# EAGLE board ciencia prima (EAGLE 5.11)
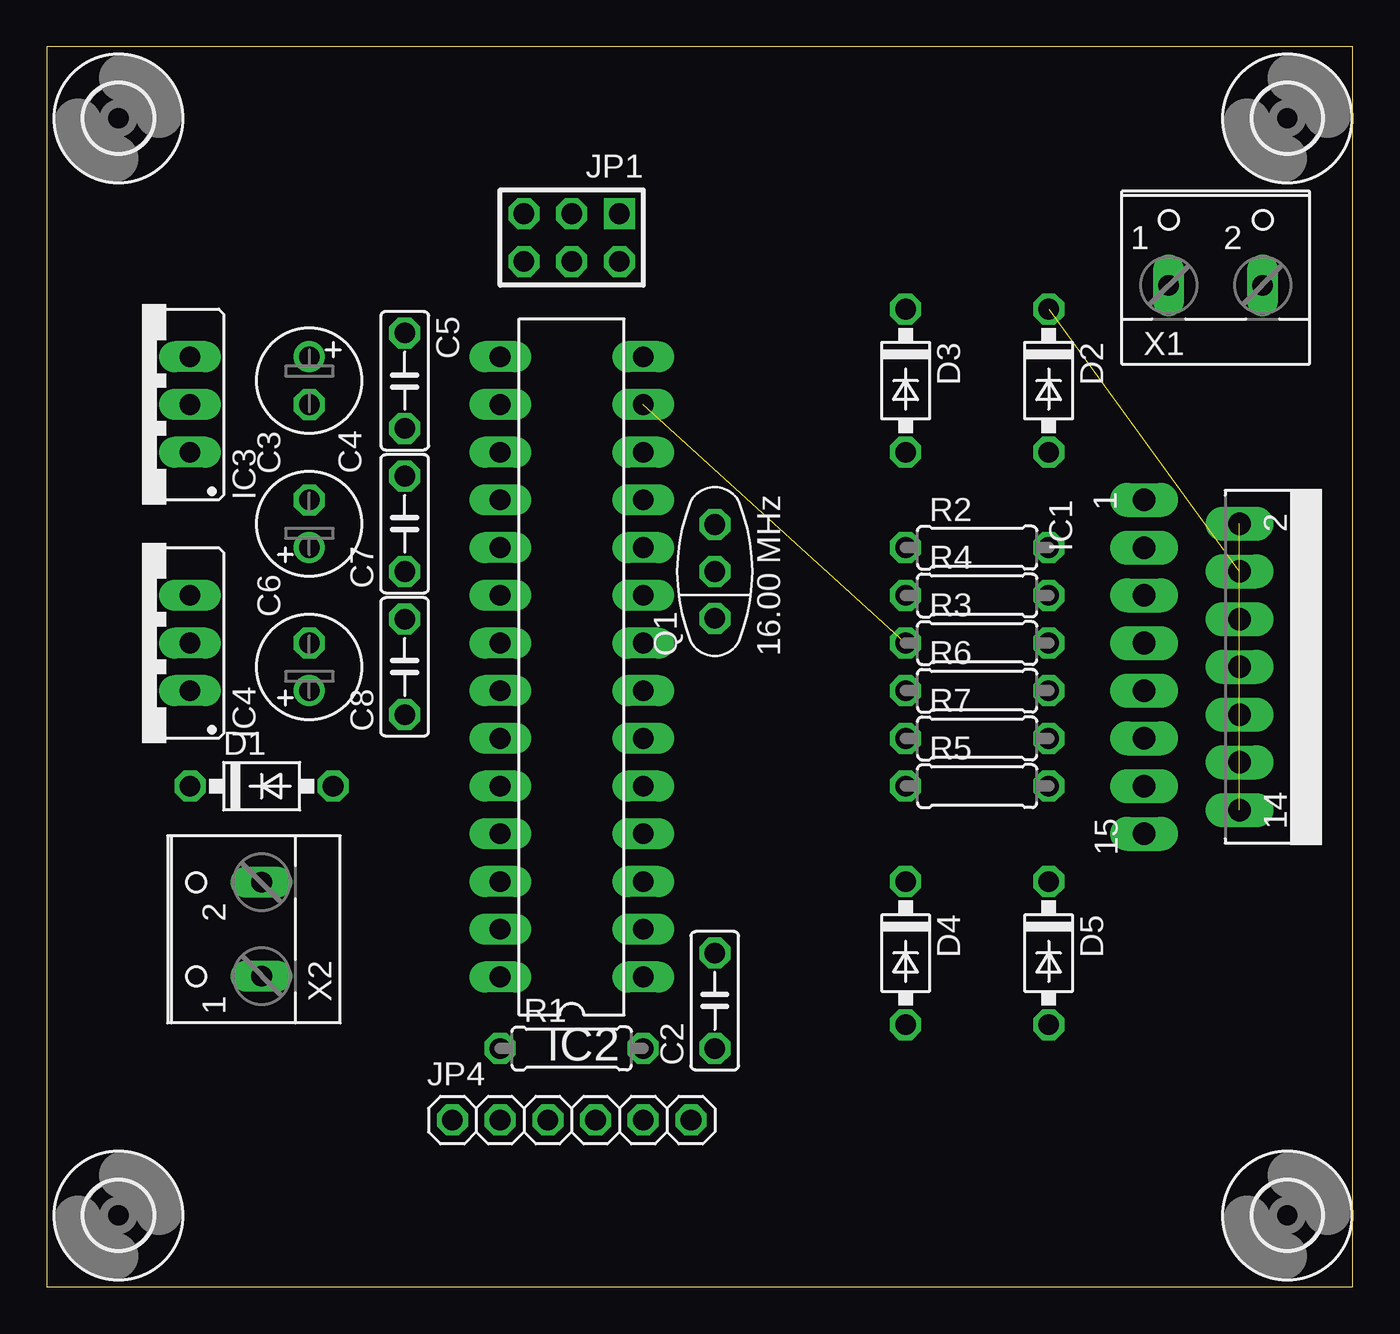
[diagram p0: board, top side]
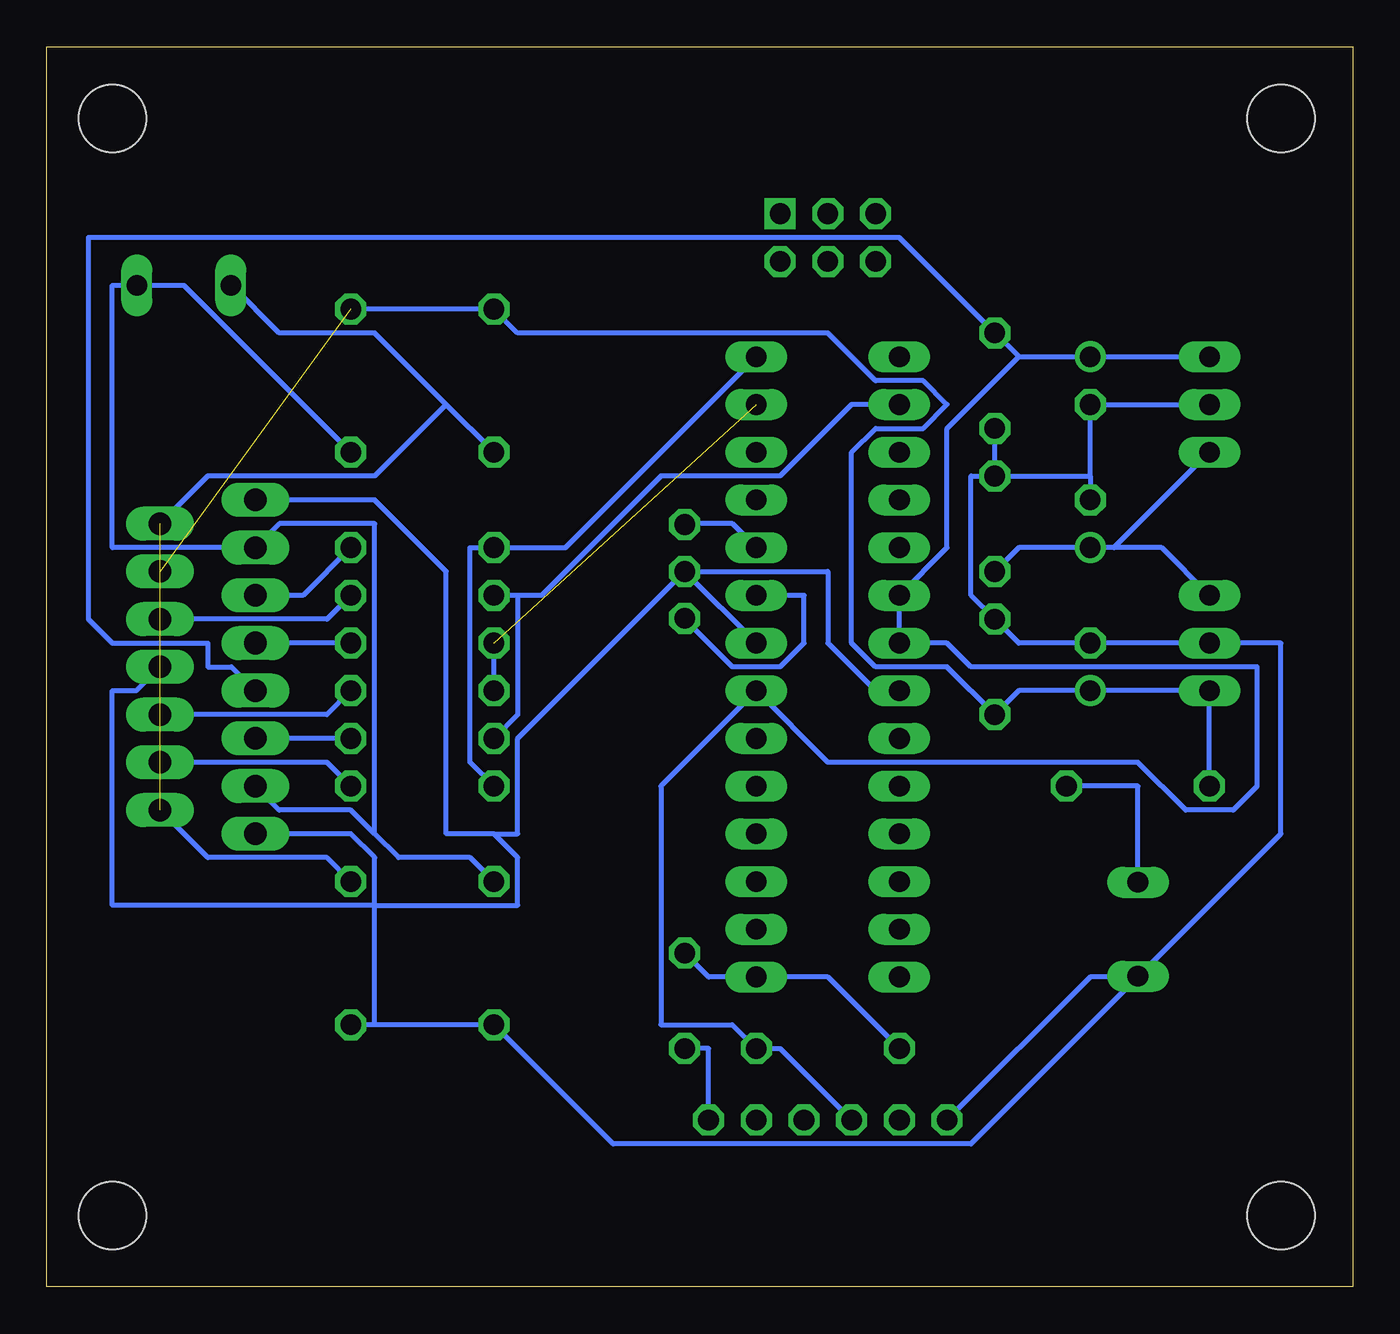
[diagram p1: board, bottom side, seen from below]

Size 69.52 x 66.03 mm. Coordinates in mm from the lower left corner, seen from the top.
Outline: 0,0 69.52,0 69.52,66.03 0,66.03 0,0
Copper layers (1*16): Top 0.035mm / dielectric 1.5mm / Bottom 0.035mm
Design rules "default": minimum track width 10mil, minimum drill 24mil, track to track 8mil, track to pad 8mil, pad to pad 8mil, via to via 8mil, smd to smd 8mil, copper to edge 40mil, drill to drill 8mil, minimum pad ring 10mil, minimum via ring 8mil, stop-mask expansion 4mil, vias tented up to drill 0mil, thermal gap 10mil

## Footprints (pad centres in the part's own frame; a part is rotated, then mirrored left to right if it is on the bottom)
C050-025X075 = drill 1.1 octagon: 1 -2.54,0; 2 2.54,0
E2,5-6 = drill 1.1 round: + -1.27,0 | drill 1.1 pad 1.6 octagon: - 1.27,0
DO41-10 = drill 1.1 octagon: A 3.81,0; C -3.81,0
MULTIWATT-15 = drill 1.2 long: 1 -8.89,-7.62; 2 -7.62,-2.54; 3 -6.35,-7.62; 4 -5.08,-2.54; 5 -3.81,-7.62; 6 -2.54,-2.54; 7 -1.27,-7.62; 8 0,-2.54; 9 1.27,-7.62; 10 2.54,-2.54; 11 3.81,-7.62; 12 5.08,-2.54; 13 6.35,-7.62; 14 7.62,-2.54; 15 8.89,-7.62
DIL28-3 = drill 1.1 long: 1 -16.51,-3.81; 2 -13.97,-3.81; 3 -11.43,-3.81; 4 -8.89,-3.81; 5 -6.35,-3.81; 6 -3.81,-3.81; 7 -1.27,-3.81; 8 1.27,-3.81; 9 3.81,-3.81; 10 6.35,-3.81; 11 8.89,-3.81; 12 11.43,-3.81; 13 13.97,-3.81; 14 16.51,-3.81; 15 16.51,3.81; 16 13.97,3.81; 17 11.43,3.81; 18 8.89,3.81; 19 6.35,3.81; 20 3.81,3.81; 21 1.27,3.81; 22 -1.27,3.81; 23 -3.81,3.81; 24 -6.35,3.81; 25 -8.89,3.81; 26 -11.43,3.81; 27 -13.97,3.81; 28 -16.51,3.81
78XXS = drill 1.1 long: GND 0,-2.54; IN -2.54,-2.54; OUT 2.54,-2.54
AVR-ISP-6 = drill 1.1 square: 1 -2.54,-1.27 | drill 1.1 octagon: 2 -2.54,1.27; 3 0,-1.27; 4 0,1.27; 5 2.54,-1.27; 6 2.54,1.27
1X06 = drill 1.1 octagon: 1 -6.35,0; 2 -3.81,0; 3 -1.27,0; 4 1.27,0; 5 3.81,0; 6 6.35,0
CSTLS_G9 = drill 1.1 octagon: 1 -2.5,0; 2 0,0; 3 2.5,0
0207/7 = drill 1.1 octagon: 1 -3.81,0; 2 3.81,0
3,6 = hole 3.6: 0,0
W237-102 = drill 1.1 long: 1 -2.5,-1.27; 2 2.5,-1.27

## Placement (x,y rotation side)
C2  0.1uF  [C050-025X075]  35.56,15.24 90 top
C3  10uF/25V  [E2,5-6]  13.97,40.64 90 top
C4  100uF/16V  [E2,5-6]  13.97,48.26 270 top
C5  0.1uF  [C050-025X075]  19.05,48.26 270 top
C6  10uF/25V  [E2,5-6]  13.97,33.02 90 top
C7  0.1uF  [C050-025X075]  19.05,40.64 90 top
C8  0.1uF  [C050-025X075]  19.05,33.02 90 top
D1  1N4004A  [DO41-10]  11.43,26.67 0 top
D2  1N4004A  [DO41-10]  53.34,48.26 270 top
D3  1N4004A  [DO41-10]  45.72,48.26 270 top
D4  1N4004A  [DO41-10]  45.72,17.78 270 top
D5  1N4004A  [DO41-10]  53.34,17.78 270 top
IC1  L298  [MULTIWATT-15]  66.04,33.02 270 top
IC2  MEGA8-P  [DIL28-3]  27.94,33.02 90 top
IC3  7805  [78XXS]  5.08,46.99 90 top
IC4  [78XXS]  5.08,34.29 90 top
JP1  AVR-ISP-6  [AVR-ISP-6]  27.94,55.88 180 top
JP4  [1X06]  27.94,8.89 0 top
Q1  16.00 MHz  [CSTLS_G9]  35.56,38.1 90 top
R1  10 K  [0207/7]  27.94,12.7 0 top
R2  [0207/7]  49.53,39.37 0 top
R3  [0207/7]  49.53,34.29 0 top
R4  [0207/7]  49.53,36.83 0 top
R5  [0207/7]  49.53,26.67 0 top
R6  [0207/7]  49.53,31.75 0 top
R7  [0207/7]  49.53,29.21 0 top
U$1  [3,6]  3.81,3.81 0 top
U$2  [3,6]  3.81,62.23 0 top
U$3  [3,6]  66.04,62.23 0 top
U$4  [3,6]  66.04,3.81 0 top
X1  [W237-102]  62.23,54.61 0 top
X2  [W237-102]  10.16,19.05 90 top

## Library data of the parts
C2-C8 D1-D5 IC2-IC4 JP1 JP4 Q1 R1-R7 U$1-U$4 X1 X2 = ciencia prima
IC1 = ciencia prima; MPN: L298N; OC_FARNELL: 1589425; OC_NEWARK: 32M1527

## Nets
+5V: C4.+ C5.1 IC1.9 IC2.7 IC2.20 IC2.21 IC3.OUT JP4.3 R1.2
+12V: C3.+ C7.1 IC3.IN IC4.OUT
+24V: C6.+ C8.1 D1.C D2.C D3.C IC1.4 IC4.IN
A1: IC2.14 R2.1 R5.1
A2: IC2.13 R3.1 R6.1
EN: IC2.16 R4.1 R7.1
GND: C3.- C4.- C5.2 C6.- C7.2 C8.2 D4.A D5.A IC1.1 IC1.8 IC1.15 IC2.8 IC2.22 IC3.GND IC4.GND JP4.1 Q1.2 X2.1
N$1: D3.A D5.C IC1.2 IC1.14 X1.1
N$2: D2.A D4.C IC1.3 IC1.13 X1.2
N$3: D1.A X2.2
N$4: IC1.6 R4.2
N$5: IC1.5 R2.2
N$6: IC2.9 Q1.1
N$7: IC2.10 Q1.3
N$8: IC1.7 R3.2
N$9: IC1.12 R5.2
N$10: IC1.10 R6.2
N$11: IC1.11 R7.2
N$25: C2.1 JP4.6
RST: C2.2 IC2.1 R1.1
RXD: JP4.4
TXD: JP4.5

## Tracks (layer width: path | path; a pad name or v marks a point on that pad's centre or on a via)
+5V
  Bottom 0.254: JP4.3 30.48,12.7 R1.2 33.02,13.97 36.83,13.97 36.83,26.67 IC2.7 27.94,27.94 11.43,27.94 8.89,25.4 6.35,25.4 5.08,26.67 5.08,33.02 20.32,33.02 21.59,34.29 IC2.21 IC2.20 21.59,39.37 21.59,45.72 17.78,49.53 | IC3.OUT C4.+ 17.78,49.53 | 17.78,49.53 C5.1 24.13,55.88 67.31,55.88 67.31,35.56 66.04,34.29 60.96,34.29 60.96,33.02 59.69,33.02 IC1.9
+12V
  Bottom 0.254: IC4.OUT 10.16,39.37 12.7,39.37 | 12.7,39.37 C3.+ 17.78,39.37 C7.1 | 12.7,39.37 IC3.IN
+24V  (1 unrouted)
  Bottom 0.254: D2.C D3.C 44.45,50.8 27.94,50.8 25.4,48.26 22.86,48.26 21.59,46.99 22.86,45.72 25.4,45.72 26.67,44.45 26.67,34.29 25.4,33.02 21.59,33.02 C8.1 17.78,31.75 C6.+ IC4.IN D1.C
A1
  Bottom 0.254: R5.1 46.99,27.94 46.99,39.37 R2.1 41.91,39.37 IC2.14
A2  (1 unrouted)
  Bottom 0.254: R6.1 R3.1
EN
  Bottom 0.254: R7.1 44.45,30.48 44.45,36.83 | 44.45,36.83 R4.1 | IC2.16 26.67,46.99 30.48,43.18 36.83,43.18 43.18,36.83 44.45,36.83
GND
  Bottom 0.254: JP4.1 13.97,16.51 11.43,16.51 | C7.2 C5.2 | IC3.GND C4.- 13.97,43.18 | 13.97,43.18 C3.- | C7.2 13.97,43.18 | C7.2 20.32,43.18 20.32,36.83 C8.2 17.78,34.29 C6.- IC4.GND 3.81,34.29 3.81,24.13 11.43,16.51 | IC2.22 25.4,31.75 27.94,34.29 27.94,38.1 Q1.2 | Q1.2 IC2.8 | 52.07,13.97 D5.A | 52.07,13.97 D4.A 39.37,7.62 20.32,7.62 11.43,16.51 | IC1.15 53.34,24.13 52.07,22.86 52.07,20.32 | 52.07,13.97 52.07,20.32 | IC1.1 52.07,41.91 48.26,38.1 48.26,24.13 45.72,24.13 | 45.72,24.13 44.45,22.86 44.45,20.32 52.07,20.32 | IC1.8 64.77,31.75 66.04,31.75 66.04,20.32 52.07,20.32 | Q1.2 44.45,29.21 44.45,24.13 45.72,24.13 | X2.1 11.43,16.51
N$1  (1 unrouted)
  Bottom 0.254: D5.C 54.61,22.86 60.96,22.86 IC1.14 | 48.26,46.99 52.07,50.8 57.15,50.8 59.69,53.34 X1.1 | D3.A 48.26,46.99 | IC1.2 60.96,43.18 52.07,43.18 48.26,46.99
N$2
  Bottom 0.254: D4.C 46.99,22.86 50.8,22.86 52.07,24.13 | 52.07,24.13 53.34,25.4 57.15,25.4 IC1.13 | D2.A 62.23,53.34 X1.2 64.77,53.34 66.04,53.34 66.04,39.37 IC1.3 57.15,40.64 52.07,40.64 52.07,24.13
N$3
  Bottom 0.254: D1.A 11.43,26.67 X2.2
N$4
  Bottom 0.254: R4.2 54.61,35.56 IC1.6
N$5
  Bottom 0.254: R2.2 55.88,36.83 IC1.5
N$6
  Bottom 0.254: IC2.9 29.21,36.83 29.21,34.29 30.48,33.02 33.02,33.02 35.56,35.56 Q1.1
N$7
  Bottom 0.254: IC2.10 33.02,40.64 35.56,40.64 Q1.3
N$8
  Bottom 0.254: R3.2 IC1.7
N$9
  Bottom 0.254: R5.2 54.61,27.94 IC1.12
N$10
  Bottom 0.254: R6.2 54.61,30.48 IC1.10
N$11
  Bottom 0.254: R7.2 IC1.11
N$25
  Bottom 0.254: JP4.6 34.29,12.7 C2.1
RST
  Bottom 0.254: R1.1 27.94,16.51 IC2.1 34.29,16.51 C2.2